# Altium PCB TIDA-PowerNBIoT_PCB.PcbDoc (part 3 of 3)
Units mil, origin at the board's own origin, x right, y up, seen from the top; angles counter-clockwise.
Board outline 2500 x 2750 mil, 2 copper layers (Top Layer, Bottom Layer), stack 38.548 mil thick; 82 components, 48 nets, 212 pads, 48 vias.
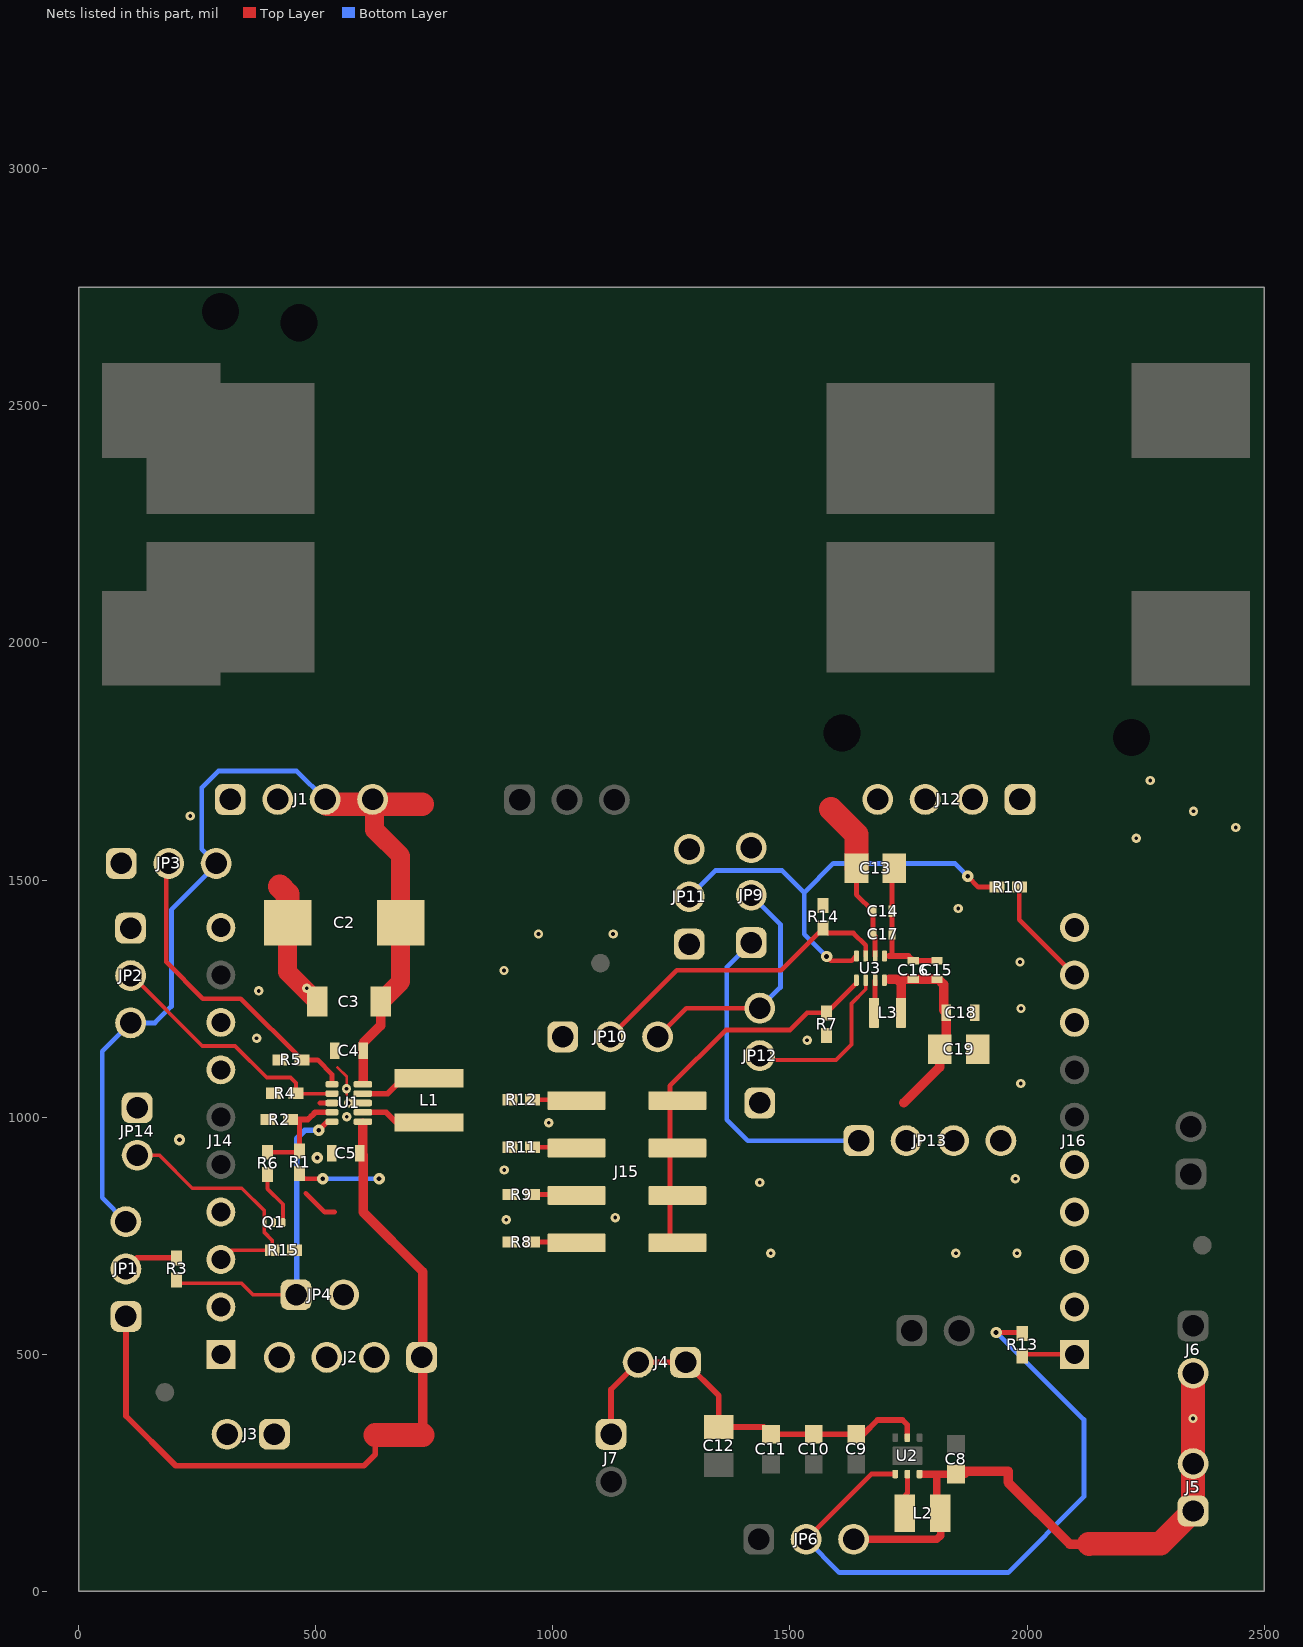
[diagram p2: the nets of this part, all layers, seen from the top]

## Via types
v1: diameter 19.68, hole 7.87, Top Layer to Bottom Layer, tented top, 38 vias
v2: diameter 24, hole 10, Top Layer to Bottom Layer, tented top, 8 vias
v3: diameter 19.68, hole 7.87, Top Layer to Bottom Layer, 2 vias

## Nets (pads, with @x,y where several pads share a name; then routed paths per layer and width w, separated by ;. In a path a pad name is that pad's centre, name@x,y a point inside that pad or via, vN(x,y) a via of type N, cw(c..) or ccw(c..) an arc to the next point about the centre after c; other vN are vias at no path point) (continued)
BUCK_GND: C13.2 C14.2 C15.2 C16.2 C17.2 C18.2 C19.2 J12.1 J12.2 JP10.1 JP11.1 JP12.1 JP13.3 JP13.4 R7.2 R8.2 R9.2 R11.2 R12.2 R14.1 U3.1 | length 304.4
  Top Layer w10: U3.1@1699.29,1340 1709.14,1340 1715.35,1346.22 C17.2@1715.35,1386.22 C14.2@1715.35,1434.41 1715.35,1520.08 C13.2@1720.24,1524.96
  Top Layer w12: 1709.14,1340 1750,1340 C16.2@1760,1330 C15.2@1810,1330
  other v1: 1459.65,712.99 1850,712.99 1978.7,712.99 901.71,783.56 1131.57,788.38 1436.49,862.48 1975.44,870 897.71,888.6 991.64,988.54 1986.46,1071.16 1536.22,1162.48 1987.2,1229.37 897.11,1309.37 1985,1327.27 970,1386.22 1127.18,1386.22 1854.88,1440 2230,1588.06 2440,1610.93 2350.96,1645.23 2260,1710
EN_BB: JP3.2 R5.2 U1.1 | length 684.4
  Top Layer w10: JP3.2@190.43,1535 184.86,1529.44 184.86,1327.47 262.33,1250 342.22,1250 R5.2@471.56,1120.65 503.97,1120.65 534.57,1090.05 U1.1@534.57,1069.37 ; U1.1@528.66,1069.37 U1.1@534.57,1069.37
EN_BOO: JP6.2 R13.2 U2.4 | length 1406.2
  Top Layer w10: JP6.2@1534.16,110 1671.78,247.61 U2.4@1722.13,247.61 ; v2(1934.67,546) 1987.62,546 R13.2@1990,543.62
  Bottom Layer w10: JP6.2@1534.16,110 1604.17,40 1960,40 2120,200 2120,362.44 1936.44,546 v2(1934.67,546)
EN_BUCK: JP11.2 R10.2 U3.4 | length 961.7
  Top Layer w10: v2(1577.27,1338.84) 1586.11,1330 1630.24,1330 U3.4@1640.24,1340 ; v2(1875,1507.96) 1897.59,1485.38 R10.2@1936.38,1485.38
  Bottom Layer w10: JP11.2@1287.81,1464.96 1342.85,1520 1483.59,1520 1530,1473.59 ; v2(1577.27,1338.84) 1530,1386.11 1530,1473.59 ; v2(1875,1507.96) 1847.96,1535 1591.41,1535 1530,1473.59
FB: R1.1 R2.2 R6.2 U1.4 | length 210.9
  Top Layer w10: R6.2@398.63,926.15 463.7,926.15 R1.1@466.18,928.62 466.18,994.12 465.3,995
  Top Layer w12: 465.3,995 483.47,995 491.37,1002.9 491.66,1002.9 499.07,1010.32 U1.4@534.57,1010.32
GND: C2.2 C3.2 C4.2 C5.2 J1.1 J1.2 J2.3 J2.4 J3.1 J3.2 JP2.1 JP3.1 JP4.2 JP14.1 Q1.2@411.5,778.05 R2.1 R4.1 R5.1 R15.1 U1.3 U1.8 | length 443.2
  Top Layer w6: 546.38,1104.8 565.5,1085.68 565.5,1048.13
  Top Layer w10: 479,839.94 518.94,800 540,800 ; 508.94,1030 U1.3@534.57,1030
  Top Layer w40: C2.2@440.91,1410 440.91,1305.79 C3.2@503.07,1243.62
  Top Layer w50: 424.41,1486.5 440.91,1470 C2.2@440.91,1410
  other v1: 565.5,1001.22 570,1030 565,1060 375.5,1166.36 380,1266.36 481.4,1271.98 235.43,1635
  other v2: 503.25,914.34 213.05,952.37
GPIO2/_DRDY: J16.2
HOST_GND: J16.10
I2C_SCL: J14.2
I2C_SDA: J14.1
L1: L1.1 U1.9 | length 153.1
  Top Layer w12: U1.9@599.53,1049.69 651.97,1049.69 684.44,1082.15 L1.1@739.13,1082.15
L2: L1.2 U1.7 | length 148.4
  Top Layer w12: U1.7@599.53,1010.32 648.66,1010.32 669.82,989.15 L1.2@739.13,989.15
MODE: JP10.2 R14.2 U3.3 | length 671.2
  Top Layer w10: JP10.2@1121,1169.44 1261.62,1310.05 1481.31,1310.05 R14.2@1570,1398.74 1580.51,1388.23 1633.86,1388.23 1659.92,1362.16 U3.3@1659.92,1340
MODE_BB: JP2.2 R4.2 U1.2 | length 540.6
  Top Layer w8: JP2.2@109.8,1298.74 112.73,1298.74 261,1150.47 330,1150.47 396.89,1083.58 447.09,1083.58 458.62,1072.05 R4.2@458.62,1050.47 459.41,1049.69 U1.2@534.57,1049.69
NetJ15_2: J15.2 R8.1 | length 137.5
  Top Layer w10: R8.1@957.19,736.89 J15.2@1094.72,736.89
NetJ15_4: J15.4 R9.1 | length 137.5
  Top Layer w10: R9.1@957.19,836.89 J15.4@1094.72,836.89
NetJ15_6: J15.6 R11.1 | length 137.5
  Top Layer w10: R11.1@957.19,936.89 J15.6@1094.72,936.89
NetJ15_8: J15.8 R12.1 | length 137.5
  Top Layer w10: R12.1@957.19,1036.89 J15.8@1094.72,1036.89
NetJ16_1: J16.1 R13.1 | length 111.5
  Top Layer w10: R13.1@1990,496.38 1993.62,500 J16.1@2100,500
NetJ16_9: J16.9 R10.1 | length 233.6
  Top Layer w10: R10.1@1983.62,1485.38 1983.62,1416.38 J16.9@2100,1300
NetJP1_2: JP1.2 R3.2 | length 130.6
  Top Layer w12: JP1.2@110,670 JP1.2@100,680 123.62,703.62 R3.2@206.67,703.62
NetQ1_3: Q1.3@431.18,778.05 R6.1 | length 114.3
  Top Layer w8: R6.1@398.63,878.9 398.63,848.97 431.18,816.41 Q1.3@431.18,778.05
PG: JP4.1 R3.1 U1.5 | length 684.3
  Top Layer w8: R3.1@206.67,656.38 213.05,650 343.41,650 367.89,625.51 JP4.1@458.75,625.51
  Top Layer w12: v2(506.75,972.36) 525.02,990.63 U1.5@534.57,990.63
  Bottom Layer w12: JP4.1@458.75,625.51 460,626.76 460,955.11 477.25,972.36 v2(506.75,972.36)
RESET: J16.3
SPI_CLK: J14.4
SPI_CS1: J16.8
SPI_MISO: J16.4
SPI_MOSI: J16.5
STOP: JP12.2 U3.6 | length 369.2
  Top Layer w8: JP12.2@1425.93,1130 1435.27,1120.65 1596.99,1120.65 1629.78,1153.44 1629.78,1239.78 1659.92,1269.92 U3.6@1659.92,1288.82
SW: L3.1 U3.7 | length 69.8
  Top Layer w10: L3.1@1677.28,1220 1679.61,1222.32 U3.7@1679.61,1288.82
SW_BOO: L2.2 U2.5 | length 87.8
  Top Layer w10: L2.2@1743.24,161.66 1743.24,203.24 1747.72,207.72 U2.5@1747.72,247.61
SYS_VCC: J14.10
UART_RX: J14.7
UART_TX: J14.8
Vin: C13.1 C14.1 C17.1 J12.3 J12.4 JP9.3 JP11.3 U3.2 | length 348.6
  Top Layer w10: C13.1@1640.24,1524.96 1640.24,1469.53 C14.1@1675.35,1434.41 C17.1@1675.35,1386.22 1679.61,1381.97 U3.2@1679.61,1340
  Top Layer w50: 1586.46,1650 1640.24,1596.22 C13.1@1640.24,1524.96
VIN_BB: C2.1 C3.1 C4.1 J1.3 J1.4 JP1.3 JP2.3 JP3.3 U1.10 | length 2218.3
  Top Layer w20: U1.10@599.53,1074.45 600,1074.92 C4.1@600,1140 600,1156.38 636.93,1193.31 C3.1@636.93,1243.62
  Top Layer w40: J1.4@624.41,1660 624.41,1605.59 679.09,1550.91 C2.1@679.09,1410 679.09,1285.79 C3.1@636.93,1243.62
  Top Layer w50: J1.3@524.41,1660 624.41,1660 724.41,1660
  Bottom Layer w10: JP1.3@100,780 50,830 50,1138.94 JP2.3@109.8,1198.74 161.09,1198.74 195.83,1233.48 195.83,1437.63 290.2,1532 JP3.3@290.2,1535 260,1565.2 260,1695 295,1730 460,1730 J1.3@520,1670
VIN_BOO: C8.1 J5.1 J5.2 J6.2 JP6.3 L2.1 U2.6 | length 1291.7
  Top Layer w16: JP6.3@1634.16,110 1810,110 1818.05,118.05 L2.1@1818.05,176.38 ; 1780,247.61 1810,247.61 ; L2.1@1810,184.42 1810,247.61 ; C8.1@1860,250.44 C8.1@1860,254.5 ; 1870,247.61 1810,247.61
  Top Layer w20: C8.1@1860,254.5 1860.8,253.7 1960,253.7 1960,230 2090,100 2130.91,100
  Top Layer w50: 2130.91,100 2130,100.91 2281.22,100.91 J5.1@2350,169.68 J5.2@2350,269.68 J6.2@2350,460
  other v1: 2350,364.84
VOUT: C15.1 C16.1 C18.1 C19.1 JP9.1 JP13.1 JP13.2 L3.2 U3.8 | length 1176.9
  Top Layer w10: U3.8@1699.29,1288.82 U3.8@1701.26,1290.79
  Top Layer w20: 1709.13,1290.79 1726.06,1290.79 ; L3.2@1734.37,1220 1734.37,1282.48 1726.06,1290.79 ; 1740,1030 1815.78,1105.78 C19.1@1815.78,1143.27 1830,1157.49 C18.1@1830,1220 1823.96,1226.04 1823.96,1280 1813.17,1290.79 1726.06,1290.79
  Bottom Layer w10: JP9.1@1418.39,1368.1 1366.99,1316.7 1366.99,995 1411.34,950.65 JP13.1@1645,950.65
VOUT_BB: C5.1 J2.1 J2.2 JP1.1 R1.2 U1.6 | length 1819
  Top Layer w10: R1.2@466.18,881.38 477.44,870.12 477.55,870 v2(515,870) ; 599.2,881.38 600,880.58
  Top Layer w12: JP1.1@100,580 100,370 205,265 601.91,265 625.75,288.84 625.75,330 ; U1.6@599.53,987.43 U1.6@599.53,990.63
  Top Layer w20: C5.1@593.62,920.47 599.53,926.38 U1.6@599.53,987.43 ; C5.1@600,920.47 600,880.58 600,800 725.75,674.25 725.75,330
  Top Layer w50: 625.75,330 725.75,330
  Bottom Layer w10: v2(515,870) 633.52,870 633.63,870.12 v2(633.75,870)
VOUT_BOO: C9.1 C10.1 C11.1 C12.1 J4.1 J4.2 J7.1 U2.2 | length 888.3
  Top Layer w12: J7.1@1122.81,331.26 1122.81,425.88 J4.2@1180,483.07 J4.1@1280,483.07 1350,413.07 C12.1@1350,346.85 1444.65,346.85 C11.1@1460,331.5 C10.1@1550,331.5 1635.35,331.51 1654.49,331.51 1684.47,361.5 1737.5,361.5 1747.72,351.28 U2.2@1747.72,324.39
VSEL: J15.1 J15.3 J15.5 J15.7 R7.1 U3.5 | length 817.9
  Top Layer w10: J15.1@1247.12,737.12 1247.12,837.12 1247.12,937.12 1247.12,1037.12 1247.12,1066.39 1364.51,1183.78 1500,1183.78 1536.22,1220 R7.1@1577.27,1220 1640.24,1282.97 U3.5@1640.24,1288.82
VSEL_BB: J14.3 JP14.2 Q1.1@391.82,778.05 R15.2 | length 524.4
  Top Layer w8: JP14.2@123.62,920 170.15,920 240,850.15 344.35,850.15 391.82,802.68 Q1.1@391.82,778.05 391.82,757.1 408.55,740.37 R15.2@408.55,719.42 319.42,719.42 J14.3@300,700
  Top Layer w12: J14.3@300,699.21 J14.3@300,700
VSELH: JP9.2 JP10.3 JP12.3 | length 522.2
  Top Layer w10: JP10.3@1221,1169.44 1281.59,1230.03 JP12.3@1436.49,1230.03
  Bottom Layer w10: JP9.2@1418.39,1468.1 1480,1406.49 1480,1273.53 JP12.3@1436.49,1230.03
pads on no net: BT1.ALIGN BT2.ALIGN BT3.0 BT4.0 FID1.1 FID2.1 FID3.1 H5.0 H6.0 H7.0 H8.0 J14.5 J14.6 J14.9 J16.6 LBL1.0 Q1.1@390.83,778.05 Q1.2@411.5,778.05 Q1.3@432.17,778.05 U1. U2.7@1730,286 U2.7@1765.43,286
copper on no net: | length 2.8
  Top Layer w12: 297.17,900 300,900

## Polygon pours and split planes (outlines as drawn)
no net on Top Layer "TOP_LAYER_NONET_P006" (solid, remove dead copper, pour order 6): 878.5,636.02 877,637.52
VOUT on Top Layer "TOP_LAYER_VOUT_P012" (solid, remove dead copper, pour order 12): 1556.77,1103.27 1723.54,1103.27 1723.54,1268.5 1722.13,1269.92 1720.55,1268.35 1695.36,1268.35 1695.36,1300 1842.5,1300 1842.5,1030 1790,1030 1790,685 1556.77,685
Vin on Top Layer "TOP_LAYER_VIN_P014" (solid, remove dead copper, pour order 14): 1220,1730 1220,1521.36 1610,1521.36 1610,1410.32 1673.72,1410.32 1673.72,1330 1685,1330 1685,1596.22 1830.19,1596.22 1830.19,1730
BUCK_GND on Top Layer "TOP_LAYER_BUCK_GND_P018" (solid, remove dead copper, pour order 18): 1810,685 2030,685 2030,1470 2480,1470 2480,1730 1695.35,1730 1695.35,1326.22 1870,1326.22 1870,1020 1810,1020
BUCK_GND on Top Layer "TOP_LAYER_BUCK_GND_P020" (solid, remove dead copper, pour order 20): 877.36,1400.71 876,1399.35 876,685 1540,685 1540,1120.32 1645.71,1120.32 1645.88,1510 876.56,1510 876.15,1399.43
no net on Top Layer "TOP_LAYER_NONET_P022" (solid, remove dead copper, pour order 22): 1094.51,1350
BOOST_GND on Top Layer "TOP_LAYER_BOOST_GND_P026" (solid, remove dead copper, pour order 26): 2050.79,638.81 1704.64,638.84 1704.64,310 1704.64,260 1760,260.59 1809.41,260 1810,260.59 2180,260.59 2180,510 2490,510 2490,1424.58 2050.79,1424.58
VIN_BOO on Top Layer "TOP_LAYER_VIN_BOO_P028" (solid, remove dead copper, pour order 28): 2489.53,497.52 2193.54,497.52 2193.54,270 1610,270 1610,30 2489.53,30
no net on Top Layer "TOP_LAYER_NONET_P030" (solid, remove dead copper, pour order 30): 2420.99,460 2430,460
VIN_BB on Top Layer "TOP_LAYER_VIN_BB_P032" (solid, remove dead copper, pour order 32): 472.94,1716.75 472.94,1486.5 580,1486.5 579.25,1485.75 579.25,1063.97 640.75,1063.97 641.25,1064.47 641.25,1127.47 838.01,1127.47 838.5,1126.98 840,1128.48 840,1716.75
VOUT_BB on Top Layer "TOP_LAYER_VOUT_BB_P034" (solid, remove dead copper, pour order 34): 577.88,232 836.58,232 837.41,1003.64 577.61,1003.64
GND on Top Layer "TOP_LAYER_GND_P036" (solid, remove dead copper, pour order 36): 38.5,1722.57 38.5,32.57 570.13,32.57 836.5,32.57 836.5,827.47 592.88,827.47 598.05,1474.64 462.88,1474.64 447.94,1489.59 447.94,1722.64
VOUT_BOO on Top Layer "TOP_LAYER_VOUT_BOO_P040" (solid, remove dead copper, pour order 40): 1045,312.53 1045,639.17 1697.42,638.84 1697.42,312.53
BOOST_GND on Top Layer "TOP_LAYER_BOOST_GND_P042" (solid, remove dead copper, pour order 42): 869.75,640 869.75,25 1742.6,25 1742.6,300.02 1046.83,300.02 1040,306.85 1040,640
no net on Top Layer "TOP_LAYER_NONET_P044" (solid, remove dead copper, pour order 44): 928,615
GND on Bottom Layer "BOTTOM_LAYER_GND_P002" (solid, remove dead copper, pour order 2): 38.5,1722.57 38.5,32.57 828.75,32.57 828.75,1722.57
BOOST_GND on Bottom Layer "BOTTOM_LAYER_BOOST_GND_P008" (solid, remove dead copper, pour order 8): 880,30 2490,30 2490,1430.74 2050,1430.74 2050,640 880,640
no net on Bottom Layer "BOTTOM_LAYER_NONET_P010" (solid, remove dead copper, pour order 10): 890,638.84
BUCK_GND on Bottom Layer "BOTTOM_LAYER_BUCK_GND_P024" (solid, remove dead copper, pour order 24): 1340,1415 874.93,1415 870,685 2030,685 2030,1470 2480,1470 2480,1730 870,1730 1340,1730

## Keep-outs
Keep-Out Layer:
  text ".Layer_Name" at 577,-858.49 h60

## Other copper
Top Layer:
  region net PG: 514.41,987.24
  pour cut-out: 539.91,1090.05 539.91,1064.98 539.91,1004.12 558.09,1004.12 558.09,1090.05
  text ".Layer_Name" at 577,-858.49 h60
Bottom Layer:
  text ".Layer_Name" at 577,-858.49 h60

## Silkscreen, mask and mechanical layers (free items; w line width, h text height)
Top Overlay:
  circle w6.69: c200,1415 r35.43
  circle w6.69: c1993.62,1400 r35.43
  region: 2260,2719.92 1960,2719.92 1960,2619.92 2260,2619.92
  lines w10: 820,1700 820,1424.96 1210,1424.96 1210,1654.96 1210,1700 ; 859.5,1391.72 860,410 ; 897.11,650 2010,650 ; 900,1600 951.22,1600
  text "BUCK" at 1280,1654.96 h50
  text "VIN" at 1550,1600 h30
  text "GND" at 352.06,1580 h30
  text "VIN" at 492.33,1580 h30
  text "GND" at 2065,1580 h30
  text "2s  1s" at 975,1565 h30
  text "BATT OUT" at 870,1462 h70
  text "+" at 171.61,1434.41 h59.06 r270
  text "-" at 1975,1370 h59.06
  text "GND" at 2272.44,903.62 h30 r90
  text "GND" at 1425,810 h30
  text "VOUT_BUCK" at 1545.06,775 h30
  text "GND" at 1890,750 h30
  text "BOOST" at 1369.32,570 h72.83
  text "VOUT" at 617.25,550 h30
  text "VOUT_BB" at 1049.28,550 h30
  text "GND" at 1600.93,531.58 h30
  text "GND" at 2281.43,530 h30 r90
  text "GND" at 469,385 h30
  text "BUCK" at 604.5,334.47 h50
  text "BOOST" at 593.5,265 h72.83
  text "VIN_BOOST" at 2282.44,190 h30 r90
  text "BOOST_GND" at 1095,115.17 h30
  text ".Layer_Name" at 577,-858.49 h60
Bottom Overlay:
  text ".Layer_Name" at 577,-858.49 h60
Top Paste:
  text ".Layer_Name" at 577,-858.49 h60
Bottom Paste:
  text ".Layer_Name" at 577,-858.49 h60
Top Solder:
  text ".Layer_Name" at 577,-858.49 h60
  text ".Layer_Name" at 577,-858.49 h60
Bottom Solder:
  text ".Layer_Name" at 577,-858.49 h60
Drill Guide:
  text ".Layer_Name" at 577,-858.49 h60
M1 Board Outline:
  the board outline again, w10
  text ".Layer_Name" at 577,-858.49 h60
M2 Board Dimensions:
  rectangle: 0,-275 125,-150
  rectangle: 125,-400 500,-275
  lines w7: 0,-275 1000,-275 ; 125,-400 125,-150 ; 250,-400 250,-150 ; 500,-400 500,-150 ; 750,-400 750,-150 ; 0,-400 1000,-400 1000,-150 0,-150 0,-400
  lines w10: 300,1390 300,1410 ; 360,1380 300,1400 ; 360,1420 300,1400 ; 924.08,1400 300,1400 ; 1475.92,1400 2100,1400 ; 2040,1380 2100,1400 ; 2040,1420 2100,1400 ; 2100,1390 2100,1410 ; 2580,1800.92 2600,1740.92 ; 2580,2690.92 2600,2750.92 ; 2590,1740.92 2610,1740.92 ; 2590,2750.92 2610,2750.92 ; 2600,1975 2600,1740.92 ; 2600,2516.84 2600,2750.92 ; 2620,1800.92 2600,1740.92 ; 2620,2690.92 2600,2750.92
  text "1010 (mil)" at 2635.99,1985 h60 r90
  text "1800 (mil)" at 934.08,1364.01 h60
  text ".Layer_Name" at 577,-858.49 h60
M3 3D STEP Top:
  text ".Layer_Name" at 577,-858.49 h60
M4 3D STEP Bottom:
  text ".Layer_Name" at 577,-858.49 h60
M5 Assembly Top:
  lines w10: -292,-930.17 6308,-930.17 ; -292,-726.83 6310,-726.83 ; -292,-523.5 -292,-1133.5 3713,-1133.5 6310,-1133.5 6310,-523.5 -291.5,-523.5 -291.5,-1133.5 1284,-1133.5 ; 2173,-1133.5 2173,-523.5 ; 3440,-726.83 3440,-523.5 ; 4280,-726.83 4280,-523.5 ; 4902,-1140 4902,-937.17
  text "COMPONENTS MARKED 'DNP' SHOULD NOT BE POPULATED." at 1153.5,-318.5 h60
  text "ASSEMBLY VARIANT:" at 1153,-434 h60
  text ".VariantName" at 2189,-434 h60
  text "PCB VIEWED FROM TOP SIDE" at -228.5,-655.67 h60
  text "BOARD #:" at 2248,-655.67 h60
  text ".PRJ_Number" at 2793.5,-655.67 h60
  text "REV:" at 3638,-655.67 h60
  text ".PCB_Rev" at 3929.5,-655.67 h60
  text "SVN REV:" at 4476,-655.67 h60
  text ".VersionControl_RevNumber" at 4982,-655.67 h60
  text "TID #:" at 2248,-859 h60
  text ".TID" at 2793.5,-859 h60
  text "PLOT NAME =" at -228.5,-1064.34 h60
  text ".plot_File_Name" at 577,-1064.34 h60
  text "GENERATED    :" at 2250,-1064.34 h60
  text ".Print_Date" at 3119.5,-1064.34 h60
  text ".Print_Time" at 3848.5,-1064.34 h60
  text "TEXAS INSTRUMENTS" at 5113,-1064.34 h60
M6 Assembly Bottom:
  lines w10: -292.5,-727.33 6309.5,-727.33 ; -290.5,-930.67 6309.5,-930.67 ; 1115.5,-1140.5 1115.5,-937.67 ; 1737.5,-727.33 1737.5,-524 ; 2577.5,-727.33 2577.5,-524 ; 3844.5,-1134 3844.5,-524 ; 4733.5,-1134 6309,-1134 6309,-524 -292.5,-524 -292.5,-1134 2304.5,-1134 6309.5,-1134 6309.5,-524
  text "COMPONENTS MARKED 'DNP' SHOULD NOT BE POPULATED." at 6102,-318 h60
  text ".VariantName" at 5058,-434 h60
  text "ASSEMBLY VARIANT:" at 6097,-434 h60
  text ".VersionControl_RevNumber" at 1035.5,-656.17 h60
  text "SVN REV:" at 1541.5,-656.17 h60
  text ".PCB_Rev" at 2088,-656.17 h60
  text "REV:" at 2379.5,-656.17 h60
  text ".PRJ_Number" at 3224,-656.17 h60
  text "BOARD #:" at 3769.5,-656.17 h60
  text "PCB VIEWED FROM BOTTOM SIDE" at 6246,-656.17 h60
  text ".TID" at 3224,-859.5 h60
  text "TID #:" at 3769.5,-859.5 h60
  text "TEXAS INSTRUMENTS" at 904.5,-1064.84 h60
  text ".Print_Time" at 2169,-1064.84 h60
  text ".Print_Date" at 2898,-1064.84 h60
  text "GENERATED    :" at 3767.5,-1064.84 h60
  text ".plot_File_Name" at 5440.5,-1064.84 h60
  text "PLOT NAME =" at 6246,-1064.84 h60
M9 Title Sheet:
  drawing of 56 lines, arcs and shapes, not listed
  text "1" at 739.84,8036.5 h70
  text "2" at 3235.5,8036.5 h70
  text "3" at 5724.84,8036.5 h70
  text "4" at 8231.51,8036.5 h70
  text "5" at 10730.5,8036.5 h70
  text "6" at 13235.5,8036.5 h70
  text "A" at -416.5,6893.5 h70
  text "A" at 14383.5,6893.5 h70
  text "B" at -416.5,4513.5 h70
  text "B" at 14383.5,4513.5 h70
  text "C" at 14383.5,2138.5 h70
  text "PROJECT TITLE:" at 11343.5,277.5 h45
  text ".PRJ_Title" at 11393.5,144.17 h70
  text "DESIGNED FOR:" at 11343.5,-23.5 h45
  text ".PRJ_Customer" at 11393.5,-163.5 h70
  text "D" at -416.5,-231.5 h70
  text "D" at 14383.5,-231.5 h70
  text "FILE NAME:" at 11343.5,-323.5 h45
  text ".PCB_File_Name_No_Path" at 11393.5,-443.5 h70
  text "Texas Instruments (TI) and/or its licensors do not warrant the accuracy or completeness of this specification" at 6374,-605.34 h45
  text "ENGINEER:" at 11343.5,-613.5 h45
  text "LAYOUT BY:" at 12848.5,-613.5 h45
  text "or any information contained therein. TI and/or its licensors do not warrant that this design will meet" at 6329.01,-718 h45
  text ".PRJ_Engineer" at 11393.5,-768.49 h70
  text ".PCB_Layout" at 12899,-768.49 h70
  text "the specifications, will be suitable for your application or fit for any particular purpose, or will operate in" at 6329.01,-830.67 h45
  text ".Layer_Name" at 577,-858.49 h60
  text "ALTIUM DESIGNER VERSION:" at 12848.5,-923.5 h45
  text "an implementation. TI and/or its licensors do not warrant that the design is production worthy. You should" at 6329.01,-943.33 h45
  text "completely validate and test your design implementation to confirm the system functionality for your application." at 6374,-1056 h45
  text ".print_Scale" at 11393.5,-1056.83 h70
  text ".Application_BuildNumber" at 12899,-1056.83 h70
  text "1" at 739.84,-1263.5 h70
  text "2" at 3235.5,-1263.5 h70
  text "3" at 5724.84,-1263.5 h70
  text "4" at 8231.51,-1263.5 h70
  text "5" at 10730.5,-1263.5 h70
  text "6" at 13235.5,-1263.5 h70
M10 Fab Notes:
  drawing of 173 lines, arcs and shapes, not listed
  text "DESIGN INFORMATION" at 12378.02,6201 h60
  text "MIN. TRACK WIDTH:" at 11733.46,6021 h60
  text "8" at 12829.7,6021 h60
  text "MIL" at 12984.46,6021 h60
  text "MIN. CLEARANCE:" at 11733.46,5889 h60
  text "0.2" at 12769.7,5889 h60
  text "mm" at 12984.46,5889 h60
  text "MIN. VIA PAD SIZE:" at 11733.46,5757 h60
  text "24" at 12799.71,5757 h60
  text "MIL" at 12984.46,5757 h60
  text "0.05mm (2MIL)" at 12428.46,5615.29 h60
  text "MINIMUM ANNULAR RING" at 11404.23,5611 h60
  text "EXTERNAL" at 13136.46,5611 h60
  text "PER" at 11604.23,5493 h60
  text "IPC-D-275 CLASS 2 LEVEL C" at 11824.23,5493 h60
  text "MIL, HOLES" at 13312.46,5380.71 h60
  text "+/-" at 12920,5380 h60
  text "+/-" at 13774,5380 h60
  text "REGISTRATION TOLERANCES:" at 11404.23,5375 h60
  text "METAL" at 12604,5375 h60
  text "5" at 13180.2,5375 h60
  text "3" at 14013.2,5375 h60
  text "MIL" at 14129.46,5375 h60
  text "+/-" at 13774,5262 h60
  text "HOLE SIZE TOLERANCE (UNLESS OTHERWISE SPECIFIED):" at 11404.23,5257 h60
  text "3" at 14013.2,5257 h60
  text "MIL" at 14129.46,5257 h60
  text "MATERIAL:" at 11329.46,5047.54 h60
  text "FR-4 High Tg" at 12315.9,4907.21 h60
  text "FR-408" at 11750.46,4898.64 h60
  text "OTHER" at 13238.46,4898.64 h60
  text "X" at 12161,4895 h60
  text "62 MIL (1.6mm) +/-10%" at 12070.56,4735.92 h60
  text "THICKNESS:" at 11404.23,4731.64 h60
  text "X" at 11942.4,4731.64 h60
  text "OTHER" at 13355.46,4731.64 h60
  text "TOLERANCE:" at 11404.23,4573.64 h60
  text "X" at 12243.53,4573.64 h60
  text "ANSI IPC-6012 TYPE 3 CLASS 2" at 12430.48,4573.64 h60
  text "OTHER +/-" at 12430.46,4417.64 h60
  text "BOW & TWIST:" at 11404.23,4260.64 h60
  text "X" at 12243.53,4260.64 h60
  text "ANSI IPC-6012 TYPE 3 CLASS 2" at 12430.48,4260.64 h60
  text "OTHER +/-" at 12430.46,4102.13 h60
  text "DRILLING:" at 11329.46,3963.64 h60
  text "REFERENCE:" at 11404.23,3846.64 h60
  text "X" at 12052.46,3846.64 h60
  text "AS SHOWN" at 12239.46,3846.64 h60
  text "X" at 12953.46,3846.64 h60
  text "NC_DRILL FILES" at 13090.46,3846.64 h60
  text "PTH COPPER THICKNESS:" at 11404.23,3688.64 h60
  text "X" at 12534.46,3688.64 h60
  text "20-30 um" at 12671.46,3688.64 h60
  text "OTHER" at 13388.46,3688.64 h60
  text "BOARD FINISH:" at 11329.46,3529.64 h60
  text "SILKSCREEN:" at 11484.68,3411.64 h60
  text "X" at 12433.46,3411.64 h60
  text "TOP" at 12559.46,3411.64 h60
  text "X" at 12943.46,3411.64 h60
  text "BOTTOM" at 13070.46,3411.64 h60
  text "SILKSCREEN COLOR:" at 11484.68,3244.64 h60
  text "X" at 12432.42,3244.64 h60
  text "WHITE" at 12559.46,3244.64 h60
  text "OTHER" at 13070.46,3244.64 h60
  text "X" at 12563.42,3085.44 h60
  text "GREEN" at 12690.46,3085.44 h60
  text "OTHER" at 13308.46,3085.44 h60
  text "SOLDER RESIST COLOR:" at 11484.68,3074.64 h60
  text "X" at 12563.42,2915.44 h60
  text "MATTE" at 12690.46,2915.44 h60
  text "SEMI-GLOSS" at 13308,2914.8 h60
  text "IMMERSION GOLD (ENIG)" at 12390.46,2726.92 h60
  text "ENEPIG" at 13728,2723.64 h60
  text "SURFACE FINISH:" at 11329.46,2722.64 h60
  text "X" at 12203.51,2722.64 h60
  text "IMM. TIN/SILVER OR EQUIV" at 11659,2565.64 h60
  text "OTHER" at 13090.46,2565.64 h60
  text "ARRAY/PANEL:" at 11329.46,2386.64 h60
  text "CUT AND TRIM PER M1 BOARD OUTLINE" at 12390.46,2382.35 h60
  text "N.C. ROUTE" at 12390.46,2230.64 h60
  text "X" at 13069.46,2230.64 h60
  text "V. SCORE" at 13256.46,2230.64 h60
  text "CERTIFICATION:" at 11329.46,2093.64 h60
  text "MATERIALS AND WORKMANSHIP FOR ALL PCBS" at 12054.46,2093.64 h60
  text "TO MEET OR EXCEED THE REQUIREMENTS OF:" at 12054.46,1995.64 h60
  text "X" at 11680.96,1859.13 h60
  text "ANSI IPC-A-600F CLASS ->" at 11819.96,1859.13 h60
  text "X" at 13459.02,1859.13 h60
  text "2" at 13577.96,1859.14 h60
  text "1" at 13262.96,1857.64 h60
  text "3" at 13931.96,1857.64 h60
  text "X" at 12495.02,1699.64 h60
  text "RoHS" at 12631.96,1699.64 h60
  text "OTHER" at 13276.36,1699.64 h60
  text "PER ORDER" at 13673.42,1699.64 h60
  text "ALL BOARDS MUST MEET OR EXCEED UL94-V0 REQUIREMENTS." at 11357,1534 h60
  text "PCB MUST BEAR THE UL94V-0 UL REGISTERED MATERIAL ID NUMBER" at 11357,1414 h60
  text "ADDITIONAL REQUIREMENTS:" at 11329.46,1240.64 h60
  text "MICROSECTION:" at 11404.23,1125.64 h60
  text "YES" at 12309.96,1125.64 h60
  text "REQUIRED" at 13171.46,969.49 h60
  text "BARE BOARD ELEC. TEST:" at 11404.23,966.64 h60
  text "NONE" at 12709.96,966.64 h60
  text "X" at 13044.46,966.64 h60
  text "PER ORDER" at 13763.46,966.64 h60
  text ".Layer_Name" at 577,-858.49 h60
M11 Gerber Information:
  lines w10: -292,-930.17 6308,-930.17 ; -292,-726.83 6310,-726.83 ; -292,-523.5 -292,-1133.5 3713,-1133.5 6310,-1133.5 6310,-523.5 -291.5,-523.5 -291.5,-1133.5 1284,-1133.5 ; 2173,-1133.5 2173,-523.5 ; 3440,-726.83 3440,-523.5 ; 4280,-726.83 4280,-523.5 ; 4902,-1140 4902,-937.17
  text "ALL ARTWORK VIEWED FROM TOP SIDE" at -228.5,-655.67 h60
  text "BOARD #:" at 2248,-655.67 h60
  text ".PRJ_Number" at 2793.5,-655.67 h60
  text "REV:" at 3638,-655.67 h60
  text ".PCB_Rev" at 3929.5,-655.67 h60
  text "SVN REV:" at 4476,-655.67 h60
  text ".VersionControl_RevNumber" at 4982,-655.67 h60
  text "LAYER NAME =" at -228.5,-858.49 h60
  text "TID #:" at 2248,-859 h60
  text ".TID" at 2793.5,-859 h60
  text "PLOT NAME =" at -228.5,-1064.34 h60
  text ".plot_File_Name" at 577,-1064.34 h60
  text "GENERATED    :" at 2250,-1064.34 h60
  text ".Print_Date" at 3119.5,-1064.34 h60
  text ".Print_Time" at 3848.5,-1064.34 h60
  text "TEXAS INSTRUMENTS" at 5113,-1064.34 h60
M12 Stackup:
  drawing of 191 lines, arcs and shapes, not listed
  text "Layer" at 9790.58,7860 h60
  text "Name" at 10200.49,7860 h60
  text "Material" at 11130.23,7860 h60
  text "Thickness" at 11990,7860 h60
  text "Constant" at 12639.84,7860 h60
  text "Board Layer Stack" at 13209.7,7860 h60
  text "1" at 9790.58,7740 h60
  text "Top Overlay" at 10200.49,7740 h60
  text "2" at 9790.58,7620 h60
  text "Top Solder" at 10200.49,7620 h60
  text "Solder Resist" at 11130.23,7620 h60
  text "0.40mil" at 11990,7620 h60
  text "3.5" at 12639.84,7620 h60
  text "3" at 9790.58,7500 h60
  text "Top Layer" at 10200.49,7500 h60
  text "Copper" at 11130.23,7500 h60
  text "1.40mil" at 11990,7500 h60
  text "4" at 9790.58,7380 h60
  text "Dielectric1" at 10200.49,7380 h60
  text "FR-4" at 11130.23,7380 h60
  text "35.75mil" at 11990,7380 h60
  text "4.8" at 12639.84,7380 h60
  text "5" at 9790.58,7260 h60
  text "Bottom Layer" at 10200.49,7260 h60
  text "Copper" at 11130.23,7260 h60
  text "1.40mil" at 11990,7260 h60
  text "6" at 9790.58,7140 h60
  text "Bottom Solder" at 10200.49,7140 h60
  text "Solder Resist" at 11130.23,7140 h60
  text "0.40mil" at 11990,7140 h60
  text "3.5" at 12639.84,7140 h60
  text "7" at 9790.58,7020 h60
  text "Bottom Overlay" at 10200.49,7020 h60
  text ".Layer_Name" at 577,-858.49 h60
M13 Component Bodies Top:
  text ".Layer_Name" at 577,-858.49 h60
M14 Component Bodies Bottom:
  text ".Layer_Name" at 577,-858.49 h60
M15 Courtyards Top:
  text ".Layer_Name" at 577,-858.49 h60
M16 Courtyards Bottom:
  text ".Layer_Name" at 577,-858.49 h60
Drill Drawing:
  text ".Layer_Name" at 577,-858.49 h60
M17 Embedded Cavity:
  text ".Layer_Name" at 577,-858.49 h60
M18 Embedded Assembly:
  text ".Layer_Name" at 577,-858.49 h60
M19 Embedded Keepout:
  text ".Layer_Name" at 577,-858.49 h60

## Dimensions
0,0 to 0,2750 on M2 Board Dimensions
0,0 to 2500,0 on M2 Board Dimensions
0,-400 to 1000,-400 on M2 Board Dimensions

## Text inside footprints (layer, text, board x,y; h text height)
Logo3: Top Overlay "For evaluation only; not FCC approved for resale." at 2480,170 h60 r90
ZZ1: M5 Assembly Top "Install label in silkscreened box after final wash.  Text shall be 8 pt font.  Text shall be per the Label Table in the PDF schematic." at 251.67,3980 h40